# EAGLE board Chamber VIP_2 (EAGLE 7.6.0)
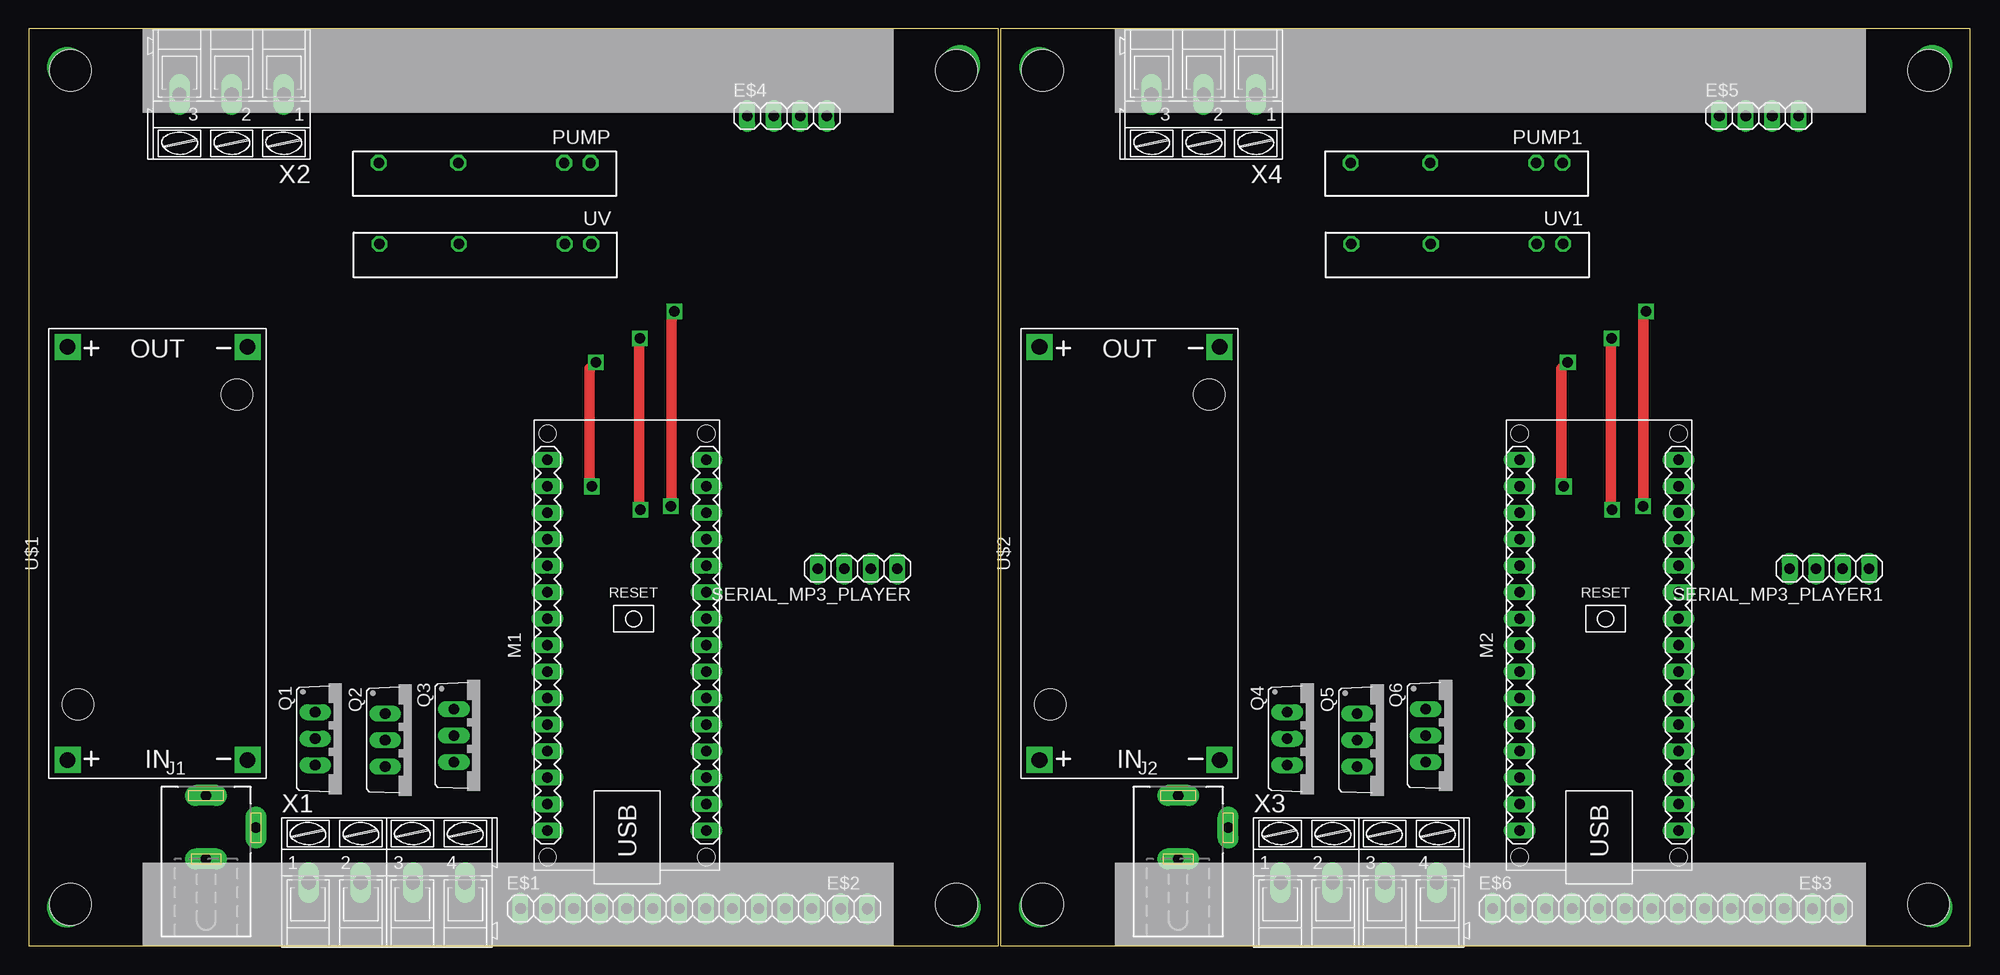
[diagram p0: board, top side]
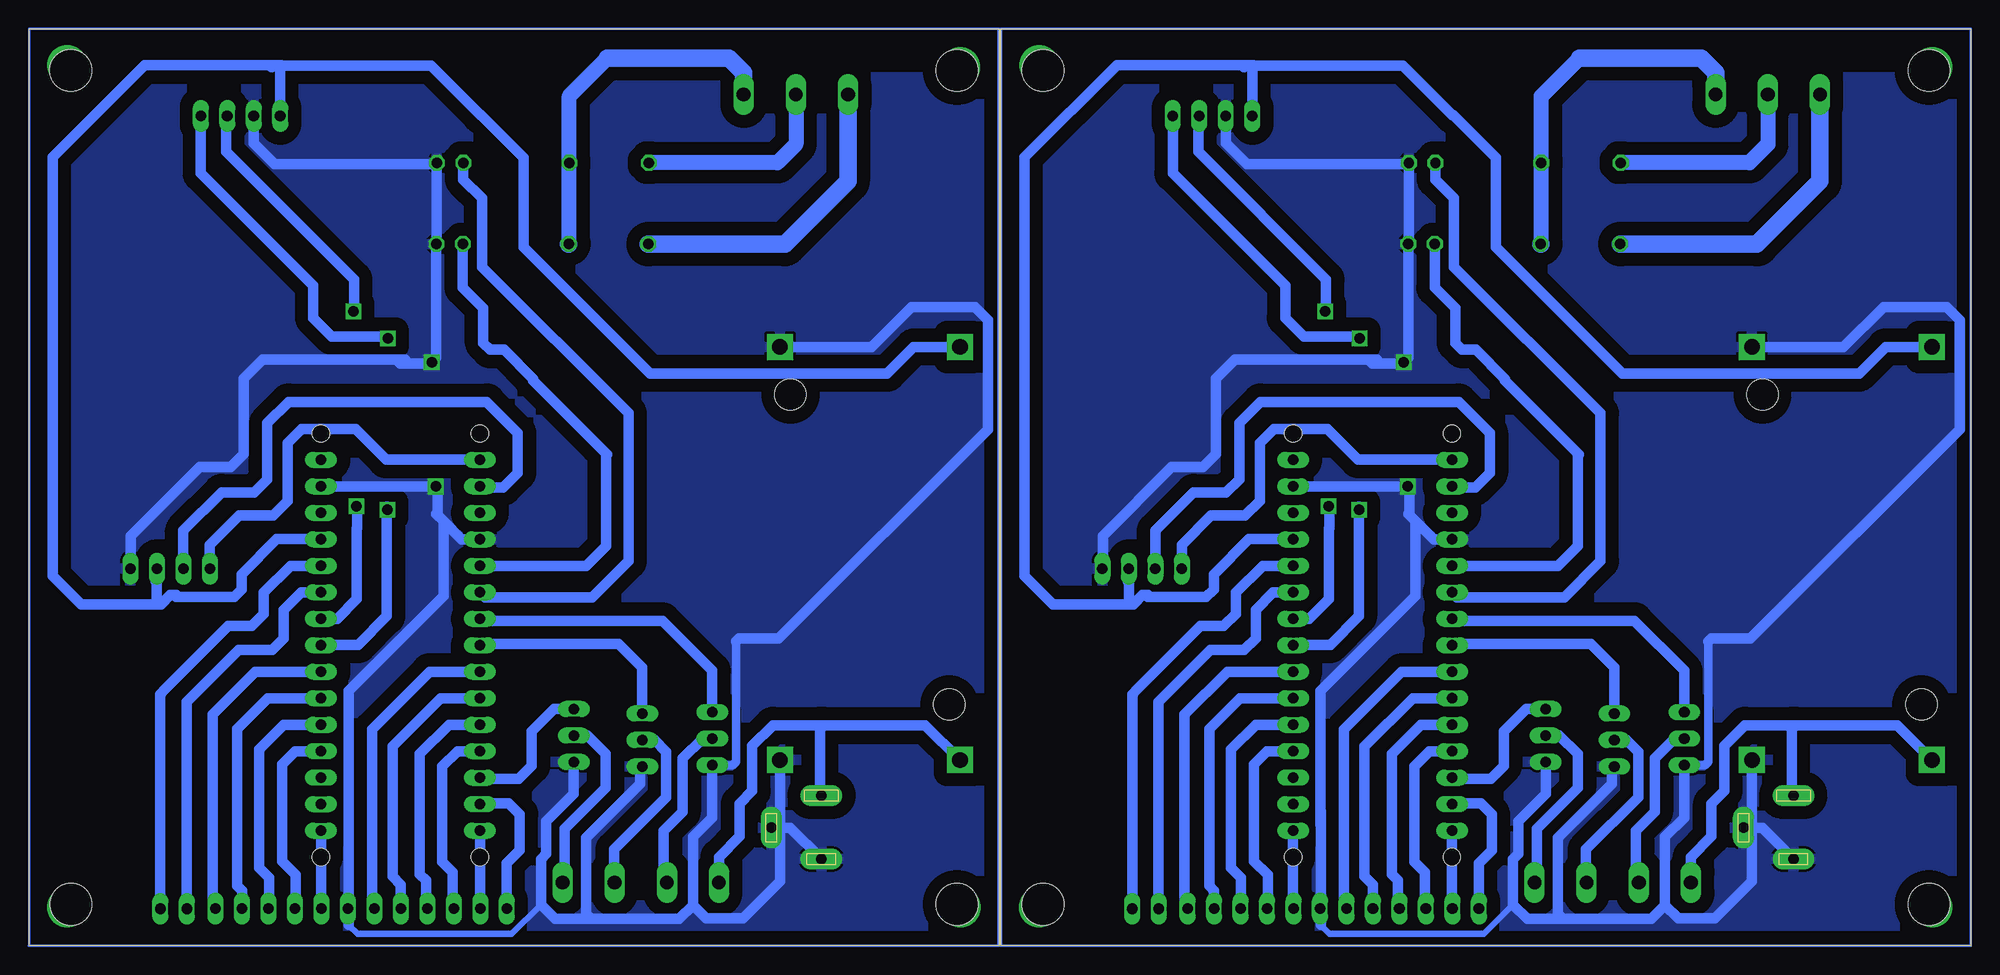
[diagram p1: board, bottom side, seen from below]

Size 186.23 x 88 mm. Coordinates in mm from the lower left corner, seen from the top.
Outline: 0,0 93,0 93,88 0,88 0,0
Outline: 93.23,0 186.23,0 186.22,88 93.23,88 93.23,0
Copper layers (1*16): Top 0.035mm / dielectric 1.5mm / Bottom 0.035mm
Design rules "default": minimum track width 10mil, minimum drill 24mil, track to track 8mil, track to pad 8mil, pad to pad 8mil, via to via 8mil, smd to smd 8mil, copper to edge 40mil, drill to drill 8mil, minimum pad ring 10mil, minimum via ring 8mil, stop-mask expansion 4mil, vias tented up to drill 0mil, thermal gap 10mil
Holes 4 mm at 4,84 89,84 88.99,4 4,4.01 97.23,84 182.22,84 182.22,4 97.23,4.01

## Footprints (pad centres in the part's own frame; a part is rotated, then mirrored left to right if it is on the bottom)
1X12 = drill 1.016 long: 1 -13.97,0; 2 -11.43,0; 3 -8.89,0; 4 -6.35,0; 5 -3.81,0; 6 -1.27,0; 7 1.27,0; 8 3.81,0; 9 6.35,0; 10 8.89,0; 11 11.43,0; 12 13.97,0
1X02 = drill 1.016 long: 1 -1.27,0; 2 1.27,0
1X04 = drill 1.016 long: 1 -3.81,0; 2 -1.27,0; 3 1.27,0; 4 3.81,0
DCJ0202 = drill 1 pad 2 long: 1 0,3.1; 2 4.8,0; 3 0,-3
ARDUINO-NANO-3.0 = drill 1 pad 1.524 long: J1.1 17.78,7.62; J1.2 15.24,7.62; J1.3 12.7,7.62; J1.4 10.16,7.62; J1.5 7.62,7.62; J1.6 5.08,7.62; J1.7 2.54,7.62; J1.8 0,7.62; J1.9 -2.54,7.62; J1.10 -5.08,7.62; J1.11 -7.62,7.62; J1.12 -10.16,7.62; J1.13 -12.7,7.62; J1.14 -15.24,7.62; J1.15 -17.78,7.62; J2.1 17.78,-7.62; J2.2 15.24,-7.62; J2.3 12.7,-7.62; J2.4 10.16,-7.62; J2.5 7.62,-7.62; J2.6 5.08,-7.62; J2.7 2.54,-7.62; J2.8 0,-7.62; J2.9 -2.54,-7.62; J2.10 -5.08,-7.62; J2.11 -7.62,-7.62; J2.12 -10.16,-7.62; J2.13 -12.7,-7.62; J2.14 -15.24,-7.62; J2.15 -17.78,-7.62 | hole 1.651: -20.32,7.62; -20.32,-7.62; 20.32,-7.62; 20.32,7.62
AQG = drill 1 octagon: + -7.62,0; - -10.16,0; O1 2.54,0; O2 10.16,0
TO220BV = drill 1.016 long: D 0,-2.54; G -2.54,-2.54; S 2.54,-2.54
DC-DC-STEP-DOWN-LM2596 = drill 1.5 pad 2.5 square: IN+ -19.812,8.636; IN- -19.812,-8.636; OUT+ 19.812,8.636; OUT- 19.812,-8.636 | hole 3: -14.478,7.62; 15.24,-7.62
AK300/4 = drill 1.321 long: 1 -7.493,0; 2 -2.515,0; 3 2.515,0; 4 7.493,0
AK300/3 = drill 1.321 long: 1 -5.004,0; 2 0,0; 3 5.004,0

## Placement (x,y rotation side)
E$1  [1X12]  61.15,3.58 0 top
E$2  [1X02]  79.15,3.57 0 top
E$3  [1X02]  172.37,3.57 0 top
E$4  [1X04]  72.73,79.63 0 top
E$5  [1X04]  165.95,79.63 0 top
E$6  [1X12]  154.38,3.58 0 top
J1  DCJ0202  [DCJ0202]  17.01,11.35 0 top
J2  DCJ0202  [DCJ0202]  110.24,11.35 0 top
M1  ARDUINO-NANO-3.0#ISP  [ARDUINO-NANO-3.0]  57.38,28.85 90 top
M2  ARDUINO-NANO-3.0#ISP  [ARDUINO-NANO-3.0]  150.61,28.85 90 top
PUMP  AQG12105  [AQG]  43.73,75.14 180 top
PUMP1  AQG12105  [AQG]  136.96,75.14 180 top
Q1  IRF540  [TO220BV]  30.02,19.88 270 top
Q2  IRF540  [TO220BV]  36.73,19.76 270 top
Q3  IRF540  [TO220BV]  43.3,20.2 270 top
Q4  IRF540  [TO220BV]  123.24,19.88 270 top
Q5  IRF540  [TO220BV]  129.96,19.76 270 top
Q6  IRF540  [TO220BV]  136.53,20.2 270 top
SERIAL_MP3_PLAYER  [1X04]  79.47,36.2 180 top
SERIAL_MP3_PLAYER1  [1X04]  172.7,36.2 180 top
U$1  DC-DC-STEP-DOWN-LM2596  [DC-DC-STEP-DOWN-LM2596]  12.36,37.65 90 top
U$2  DC-DC-STEP-DOWN-LM2596  [DC-DC-STEP-DOWN-LM2596]  105.58,37.65 90 top
UV  AQG12105  [AQG]  43.79,67.34 180 top
UV1  AQG12105  [AQG]  137.01,67.34 180 top
X1  [AK300/4]  34.34,6.09 0 top
X2  [AK300/3]  19.47,81.7 180 top
X3  [AK300/4]  127.57,6.09 0 top
X4  [AK300/3]  112.69,81.7 180 top

## Library data of the parts
E$1-E$6 SERIAL_MP3_PLAYER SERIAL_MP3_PLAYER1 = pinhead
J1 J2 = con-jack; OC_FARNELL: unknown; OC_NEWARK: unknown
M1 M2 U$1 U$2 = diy-modules
PUMP PUMP1 UV UV1 = relay; MF: AROMAT/ MATSUSHITA; MPN: AQG12105; OC_FARNELL: unknown; OC_NEWARK: 20J4759
Q1-Q6 = transistor-power
X1-X4 = con-ptr500; OC_FARNELL: unknown; OC_NEWARK: unknown

## Nets
3V1: M2.J2.14
3V3: M1.J2.14
+5V: E$4.1 M1.J2.4 SERIAL_MP3_PLAYER.2 U$1.OUT+
+5V1: E$5.1 M2.J2.4 SERIAL_MP3_PLAYER1.2 U$2.OUT+
GND: E$1.7 E$4.2 J1.2 J1.3 M1.J1.4 M1.J2.2 PUMP.- Q1.S Q2.S Q3.S SERIAL_MP3_PLAYER.1 U$1.IN- U$1.OUT- UV.-
GND1: E$5.2 E$6.7 J2.2 J2.3 M2.J1.4 M2.J2.2 PUMP1.- Q4.S Q5.S Q6.S SERIAL_MP3_PLAYER1.1 U$2.IN- U$2.OUT- UV1.-
N$1: Q3.D X1.4
N$2: J1.1 U$1.IN+ X1.1
N$3: Q1.D X1.2
N$4: Q2.D X1.3
N$5: J2.1 U$2.IN+ X3.1
N$6: PUMP.O2 X2.2
N$7: PUMP.O1 UV.O1 X2.1
N$8: Q4.D X3.2
N$9: PUMP1.O2 X4.2
N$10: PUMP1.O1 UV1.O1 X4.1
N$11: M2.J1.5 UV1.+
N$12: Q6.D X3.4
N$13: M1.J1.5 UV.+
N$14: Q5.D X3.3
N$16: M2.J1.6 PUMP1.+
N$20: M1.J1.6 PUMP.+
N$25: E$1.2 M1.J1.15
N$29: UV.O2 X2.3
N$30: E$6.2 M2.J1.15
N$31: UV1.O2 X4.3
S$1: E$4.3 M1.J2.7
S$4: M1.J1.2 SERIAL_MP3_PLAYER.3
S$5: M1.J1.1 SERIAL_MP3_PLAYER.4
S$6: E$1.6 M1.J1.9
S$7: M1.J1.7 Q1.G
S$8: E$1.4 M1.J1.11
S$9: E$1.3 M1.J1.12
S$10: M1.J1.13 Q3.G
S$11: E$1.1 M1.J1.14
S$12: E$2.2 M1.J2.5
S$13: E$2.1 M1.J2.6
S$14: E$1.12 M1.J2.9
S$15: E$1.11 M1.J2.10
S$16: E$1.10 M1.J2.11
S$17: E$1.9 M1.J2.12
S$18: E$1.8 M1.J2.15
S$19: M1.J1.8 Q2.G
S$20: E$4.4 M1.J2.8
S$21: E$1.5 M1.J1.10
S$23: E$6.5 M2.J1.10
S$24: E$6.4 M2.J1.11
S$25: E$6.6 M2.J1.9
S$26: M2.J1.2 SERIAL_MP3_PLAYER1.3
S$27: M2.J1.7 Q4.G
S$29: M2.J1.1 SERIAL_MP3_PLAYER1.4
S$30: E$6.3 M2.J1.12
S$31: M2.J1.13 Q6.G
S$32: E$6.1 M2.J1.14
S$33: E$3.2 M2.J2.5
S$34: E$3.1 M2.J2.6
S$35: E$6.12 M2.J2.9
S$36: E$6.11 M2.J2.10
S$37: E$6.10 M2.J2.11
S$38: E$6.9 M2.J2.12
S$39: E$6.8 M2.J2.15
S$40: E$5.3 M2.J2.7
S$41: E$5.4 M2.J2.8
S$42: M2.J1.8 Q5.G
VIN: M1.J2.1
VIN1: M2.J2.1

## Tracks (layer width: path | path; a pad name or v marks a point on that pad's centre or on a via)
+5V
  Bottom 1.016: 68.76,84.45 54.46,84.45 49.7,79.69 49.64,79.69 45.56,75.61 45.56,67.05 33.44,54.93 10.71,54.93 8.17,57.47 U$1.OUT+ | 68.76,84.45 69.15,84.45 | 69.15,84.45 69.89,84.45 69.73,84.3 | M1.J2.4 65.03,39.03 69.24,39.03 72.61,35.66 72.61,34.21 73.33,33.48 78.91,33.48 78.91,33.66 79.45,33.66 80.33,32.78 80.96,32.78 | SERIAL_MP3_PLAYER.2 80.75,34.96 | 80.75,34.96 80.85,34.96 | 80.96,32.78 88.02,32.78 90.74,35.5 90.74,75.66 81.9,84.5 68.81,84.5 68.76,84.45 | 80.75,34.96 80.75,32.99 80.96,32.78 | E$4.1 68.92,84.22 69.15,84.45
+5V1
  Bottom 1.016: 161.99,84.45 147.69,84.45 142.93,79.69 142.86,79.69 138.79,75.61 138.79,67.05 126.67,54.93 103.93,54.93 101.4,57.47 U$2.OUT+ | 161.99,84.45 162.38,84.45 | 162.38,84.45 163.11,84.45 162.96,84.3 | M2.J2.4 158.25,39.03 162.47,39.03 165.84,35.66 165.84,34.21 166.56,33.48 172.13,33.48 172.13,33.66 172.68,33.66 173.56,32.78 174.19,32.78 | SERIAL_MP3_PLAYER1.2 173.97,34.96 | 173.97,34.96 174.07,34.96 | 174.19,32.78 181.24,32.78 183.97,35.5 183.97,75.66 175.13,84.5 162.04,84.5 161.99,84.45 | 173.97,34.96 173.97,32.99 174.19,32.78 | E$5.1 162.14,84.22 162.38,84.45
GND  (via drill 1)
  Top 1.016: 53.84,55.45 v54.39,55.99 53.79,55.39 53.79,44.09 v54.01,44.09
  Bottom 0.61: 43.91,3.96 46.72,1.15 61.51,1.15 62.34,1.98 62.34,2.04
  Bottom 0.813: 25.17,29.21 25.17,17.67 25.52,17.32 27.46,17.32 Q1.S
  Bottom 1.016: J1.3 20.01,11.35 J1.2 21,12.17 U$1.IN- 21,6.2 24.54,2.65 28.05,2.65 29.32,3.92 | Q2.S 34.41,17 34.41,15.56 39.59,10.38 39.59,3.07 39.12,2.6 | Q1.S 27.48,12.31 29.32,10.47 29.32,3.92 | 29.32,3.92 30.64,2.6 39.12,2.6 | 39.12,2.6 42.55,2.6 43.91,3.96 43.91,8.33 43.41,8.83 43.41,11.97 40.76,14.61 Q3.S | 62.34,12.9 62.34,11.58 | 62.34,11.58 62.34,3.91 | 62.34,3.91 62.34,2.04 | 62.34,11.58 62.37,11.61 62.37,24.46 53.25,33.58 53.25,40.76 | 57.77,56.26 70.59,56.26 72.4,54.45 72.4,47.19 73.66,45.93 76.65,45.93 83.24,39.34 83.24,35.82 | 57.77,56.26 56.94,56.26 | U$1.OUT- 12.21,57.47 8.37,61.31 2.3,61.31 1.05,60.06 1.05,49.57 21.13,29.49 24.89,29.49 25.17,29.21 | PUMP.- | PUMP.- 53.89,67.4 UV.- 53.95,56.43 v54.39,55.99 54.5,55.88 57.4,55.88 57.77,56.26 | M1.J1.4 51.5,39.01 53.25,40.76 | 53.25,40.76 53.95,41.46 | E$4.2 71.46,77.02 69.43,74.99 54.04,74.99 PUMP.- | 53.25,40.76 | E$1.7 62.42,3.83 62.34,3.91 | M1.J2.2 54.06,44.09 53.84,43.87 | 53.84,43.87 53.84,41.41 53.84,41.35 53.25,40.76 | 53.84,43.87 53.84,43.92 v54.01,44.09
  pour Bottom (isolate 1.27): 0.32,83.32 93.31,83.32 93.31,-0.54 0.32,-0.54
GND1  (via drill 1)
  Top 1.016: 147.07,55.45 v147.61,55.99 147.01,55.39 147.01,44.09 v147.23,44.09
  Bottom 0.61: 137.13,3.96 139.95,1.15 154.74,1.15 155.57,1.98 155.57,2.04
  Bottom 0.813: 118.4,29.21 118.4,17.67 118.74,17.32 120.69,17.32 Q4.S
  Bottom 1.016: J2.3 113.24,11.35 J2.2 114.22,12.17 U$2.IN- 114.22,6.2 117.77,2.65 121.28,2.65 122.55,3.92 | Q5.S 127.64,17 127.64,15.56 132.82,10.38 132.82,3.07 132.34,2.6 | Q4.S 120.7,12.31 122.55,10.47 122.55,3.92 | 122.55,3.92 123.87,2.6 132.34,2.6 | 132.34,2.6 135.77,2.6 137.13,3.96 137.13,8.33 136.63,8.83 136.63,11.97 133.99,14.61 Q6.S | 155.57,12.9 155.57,11.58 | 155.57,11.58 155.57,3.91 | 155.57,3.91 155.57,2.04 | 155.57,11.58 155.59,11.61 155.59,24.46 146.48,33.58 146.48,40.76 | 151,56.26 163.81,56.26 165.62,54.45 165.62,47.19 166.88,45.93 169.87,45.93 176.47,39.34 176.47,35.82 | 151,56.26 150.16,56.26 | U$2.OUT- 105.44,57.47 101.59,61.31 95.53,61.31 94.28,60.06 94.28,49.57 114.36,29.49 118.12,29.49 118.4,29.21 | PUMP1.- | PUMP1.- 147.12,67.4 UV1.- 147.17,56.43 v147.61,55.99 147.72,55.88 150.62,55.88 151,56.26 | M2.J1.4 144.72,39.01 146.47,40.76 | 146.47,40.76 147.18,41.46 | E$5.2 164.68,77.02 162.66,74.99 147.26,74.99 PUMP1.- | 146.48,40.76 146.47,40.76 | E$6.7 155.65,3.83 155.57,3.91 | M2.J2.2 147.29,44.09 147.07,43.87 | 147.07,43.87 147.07,41.41 147.07,41.35 146.48,40.76 | 147.07,43.87 147.07,43.92 v147.23,44.09
  pour Bottom (isolate 1.27): 93.55,83.32 186.54,83.32 186.54,-0.54 93.55,-0.54
N$1
  Bottom 1.016: X1.4 41.62,6.31 41.62,11.24 37.71,15.15 37.71,18.42 39.49,20.2 Q3.D
N$2
  Bottom 1.016: 17.16,21.18 21.67,21.18 23.66,19.2 23.66,14.87 24.88,13.64 24.88,10.5 26.85,8.53 X1.1 | 17.16,21.18 16.83,21.18 | 16.83,21.18 7.06,21.18 U$1.IN+ | 16.76,21.11 16.83,21.18 | J1.1 17.16,14.59 17.16,21.18
N$3
  Bottom 1.016: X1.2 32.15,6.41 32.15,11.05 30.33,12.87 30.33,17.98 28.43,19.88 Q1.D
N$4
  Bottom 1.016: Q2.D 33.03,19.76 31.91,18.63 31.91,14.27 36.91,9.27 36.91,6.14 X1.3
N$5
  Bottom 1.016: 110.38,21.18 114.9,21.18 116.88,19.2 116.88,14.87 118.11,13.64 118.11,10.5 120.08,8.53 X3.1 | 110.38,21.18 110.06,21.18 | 110.06,21.18 100.29,21.18 U$2.IN+ | 109.99,21.11 110.06,21.18 | J2.1 110.38,14.59 110.38,21.18
N$6
  Bottom 1.422: X2.2 19.47,76.9 21.24,75.13 PUMP.O2
  Bottom 1.676: X2.2 19.47,81.44 19.42,81.39
N$7
  Bottom 1.422: UV.O1 41.19,67.34 PUMP.O1 41.19,81.52 37.56,85.16
  Bottom 1.676: X2.1 24.47,83.77 25.86,85.16 37.56,85.16 | UV.O1
N$8
  Bottom 1.016: X3.2 125.37,6.41 125.37,11.05 123.55,12.87 123.55,17.98 121.66,19.88 Q4.D
N$9
  Bottom 1.422: X4.2 112.69,76.9 114.46,75.13 PUMP1.O2
  Bottom 1.676: X4.2 112.69,81.44 112.64,81.39
N$10
  Bottom 1.422: UV1.O1 134.42,67.34 PUMP1.O1 134.42,81.52 130.79,85.16
  Bottom 1.676: X4.1 117.7,83.77 119.08,85.16 130.79,85.16 | UV1.O1
N$11
  Bottom 1.016: UV1.+ 144.63,63.15 142.67,61.19 142.67,57.84 142.03,57.2 140.69,57.2 137.89,54.4 137.89,54.23 131.62,47.96 130.89,47.23 | 130.89,47.23 130.8,47.14 | M2.J1.5 132.82,36.47 130.89,38.4 130.89,47.23
N$12
  Bottom 1.016: X3.4 134.84,6.31 134.84,11.24 130.93,15.15 130.93,18.42 132.71,20.2 Q6.D
N$13
  Bottom 1.016: UV.+ 51.41,63.15 49.45,61.19 49.45,57.84 48.8,57.2 47.46,57.2 44.66,54.4 44.66,54.23 38.4,47.96 37.66,47.23 | 37.66,47.23 37.57,47.14 | M1.J1.5 39.59,36.47 37.66,38.4 37.66,47.23
N$14
  Bottom 1.016: Q5.D 126.26,19.76 125.13,18.63 125.13,14.27 130.14,9.27 130.14,6.14 X3.3
N$16
  Bottom 1.016: PUMP1.+ 144.58,73.54 142.78,71.74 142.78,65.14 128.75,51.11 128.75,36.93 132.23,33.45 142.51,33.45 M2.J1.6 142.97,33.95
N$17  (via drill 2.8 pad 3.81)
  other vias: 182.58,3.71
N$18  (via drill 2.8 pad 3.81)
  other vias: 89.36,3.71
N$20
  Bottom 1.016: PUMP.+ 51.35,73.54 49.55,71.74 49.55,65.14 35.52,51.11 35.52,36.93 39,33.45 49.28,33.45 M1.J1.6 49.74,33.95
N$21  (via drill 2.8 pad 3.81)
  other vias: 3.67,3.72
N$23  (via drill 2.8 pad 3.81)
  other vias: 89.35,84.49
N$24  (via drill 2.8 pad 3.81)
  other vias: 3.7,84.31
N$25
  Bottom 1.016: M1.J1.15 49.76,3.62 E$1.2
N$26  (via drill 2.8 pad 3.81)
  other vias: 96.9,3.72
N$27  (via drill 2.8 pad 3.81)
  other vias: 182.57,84.49
N$28  (via drill 2.8 pad 3.81)
  other vias: 96.93,84.31
N$29
  Bottom 1.676: X2.3 14.46,73.36 20.51,67.31 33.6,67.31 UV.O2
N$30
  Bottom 1.016: M2.J1.15 142.99,3.62 E$6.2
N$31
  Bottom 1.676: X4.3 107.69,73.36 113.73,67.31 126.82,67.31 UV1.O2
S$1  (via drill 1)
  Top 1.016: v61.6,42.17 61.6,42.01 61.65,41.95 61.65,60.87 61.83,61.05 61.83,60.97 v61.91,60.89
  Bottom 1.016: M1.J2.7 63.46,31.39 61.58,33.27 61.58,40.04 61.52,40.1 61.52,42.1 v61.6,42.17 | v61.91,60.89 61.83,60.97 61.83,63.94 74.08,76.18 74.08,79.55 E$4.3
S$2
  Bottom 0.254: 0,88 93,88 93,0
S$4
  Bottom 1.016: SERIAL_MP3_PLAYER.3 78.2,39.86 74.55,43.51 71.42,43.51 70.16,44.77 70.16,50.15 68.12,52.19 49.11,52.19 46.15,49.22 46.15,45.38 47.52,44 49.68,44 M1.J1.2
S$5
  Bottom 1.016: SERIAL_MP3_PLAYER.4 75.67,38.47 72.86,41.28 69.61,41.28 68.19,42.71 68.19,48.25 66.84,49.6 61.7,49.6 58.77,46.67 49.8,46.67 M1.J1.1
S$6
  Bottom 1.016: M1.J1.9 54.59,26.31 60.12,20.78 60.12,3.81 E$1.6
S$7
  Bottom 1.016: 49.68,31.31 M1.J1.7 49.57,31.2 32.26,31.2 27.48,26.42 Q1.G
S$8
  Bottom 1.016: M1.J1.11 52.72,21.23 55.53,18.42 55.53,6.87 54.94,6.28 54.94,3.72 E$1.4
S$9
  Bottom 1.016: M1.J1.12 51.91,18.69 53.36,17.24 53.36,8.05 52.38,7.07 52.38,3.7 E$1.3
S$10
  Bottom 1.016: Q3.G 42.62,22.74 44.78,20.58 44.78,17.3 46.03,16.05 49.67,16.05 M1.J1.13
S$11
  Bottom 1.016: E$1.1 47.18,7.94 45.95,9.17 45.95,12.65 47,13.69 49.67,13.69 M1.J1.14
S$12
  Bottom 1.016: M1.J2.5 67.91,36.47 70.48,33.9 70.48,31.86 71.66,30.68 73.89,30.68 79.97,24.59 80.42,24.15 | 80.42,24.15 | E$2.2 80.42,24.15
S$13
  Bottom 1.016: M1.J2.6 66.91,33.93 68.58,32.26 68.58,29.5 69.7,28.39 72.91,28.39 77.89,23.4 77.89,3.58 E$2.1
S$14
  Bottom 1.016: M1.J2.9 71.31,26.31 75.4,22.22 75.4,3.86 E$1.12
S$15
  Bottom 1.016: M1.J2.10 70.12,23.77 73.04,20.84 73.04,5.76 72.58,5.3 E$1.11
S$16
  Bottom 1.016: M1.J2.11 68.57,21.23 70.95,18.85 70.95,7.51 69.98,6.54 69.98,3.64 E$1.10
S$17
  Bottom 1.016: M1.J2.12 67.5,18.69 68.75,17.44 68.75,8.14 67.41,6.81 67.41,3.67 E$1.9
S$18
  Bottom 1.016: M1.J2.15 65,3.62 E$1.8
S$19
  Bottom 1.016: Q2.G 34.19,26.7 36.46,28.97 49.88,28.97 | 50.29,28.97 49.88,28.97 | 49.88,28.97 M1.J1.8
S$20  (via drill 1)
  Top 1.016: v58.6,58.28 58.54,58.22 58.54,41.97 v58.65,41.86
  Bottom 1.016: E$4.4 76.54,74.12 65.75,63.33 65.75,60.25 63.98,58.48 58.8,58.48 v58.6,58.28 | v58.65,41.86 58.65,42.14 58.69,42.18 58.69,31.64 61.43,28.9 64.95,28.9 M1.J2.8
S$21
  Bottom 1.016: M1.J1.10 53.52,23.77 58.15,19.14 58.15,6.67 57.36,5.89 57.36,3.6 E$1.5
S$22
  Bottom 0.254: 0.02,87.91 0.02,0 93.04,0
S$23
  Bottom 1.016: M2.J1.10 146.75,23.77 151.38,19.14 151.38,6.67 150.59,5.89 150.59,3.6 E$6.5
S$24
  Bottom 1.016: M2.J1.11 145.94,21.23 148.75,18.42 148.75,6.87 148.16,6.28 148.16,3.72 E$6.4
S$25
  Bottom 1.016: M2.J1.9 147.81,26.31 153.34,20.78 153.34,3.81 E$6.6
S$26
  Bottom 1.016: SERIAL_MP3_PLAYER1.3 171.43,39.86 167.78,43.51 164.65,43.51 163.38,44.77 163.38,50.15 161.35,52.19 142.34,52.19 139.37,49.22 139.37,45.38 140.75,44 142.9,44 M2.J1.2
S$27
  Bottom 1.016: 142.91,31.31 M2.J1.7 142.8,31.2 125.48,31.2 120.7,26.42 Q4.G
S$28
  Bottom 0.254: 93.23,88 186.23,88 186.23,0
S$29
  Bottom 1.016: SERIAL_MP3_PLAYER1.4 168.89,38.47 166.08,41.28 162.84,41.28 161.41,42.71 161.41,48.25 160.07,49.6 154.93,49.6 152,46.67 143.03,46.67 M2.J1.1
S$30
  Bottom 1.016: M2.J1.12 145.14,18.69 146.59,17.24 146.59,8.05 145.61,7.07 145.61,3.7 E$6.3
S$31
  Bottom 1.016: Q6.G 135.85,22.74 138.01,20.58 138.01,17.3 139.26,16.05 142.89,16.05 M2.J1.13
S$32
  Bottom 1.016: E$6.1 140.41,7.94 139.18,9.17 139.18,12.65 140.23,13.69 142.9,13.69 M2.J1.14
S$33
  Bottom 1.016: M2.J2.5 161.14,36.47 163.71,33.9 163.71,31.86 164.89,30.68 167.11,30.68 173.2,24.59 173.64,24.15 | 173.64,24.15 173.65,24.15 | E$3.2 173.64,24.15
S$34
  Bottom 1.016: M2.J2.6 160.14,33.93 161.81,32.26 161.81,29.5 162.92,28.39 166.13,28.39 171.12,23.4 171.12,3.58 E$3.1
S$35
  Bottom 1.016: M2.J2.9 164.54,26.31 168.63,22.22 168.63,3.86 E$6.12
S$36
  Bottom 1.016: M2.J2.10 163.34,23.77 166.27,20.84 166.27,5.76 165.81,5.3 E$6.11
S$37
  Bottom 1.016: M2.J2.11 161.8,21.23 164.18,18.85 164.18,7.51 163.2,6.54 163.2,3.64 E$6.10
S$38
  Bottom 1.016: M2.J2.12 160.72,18.69 161.97,17.44 161.97,8.14 160.64,6.81 160.64,3.67 E$6.9
S$39
  Bottom 1.016: M2.J2.15 158.23,3.62 E$6.8
S$40  (via drill 1)
  Top 1.016: v154.82,42.17 154.82,42.01 154.88,41.95 154.88,60.87 155.06,61.05 155.06,60.97 v155.14,60.89
  Bottom 1.016: M2.J2.7 156.69,31.39 154.8,33.27 154.8,40.04 154.75,40.1 154.75,42.1 v154.82,42.17 | v155.14,60.89 155.06,60.97 155.06,63.94 167.3,76.18 167.3,79.55 E$5.3
S$41  (via drill 1)
  Top 1.016: v151.83,58.28 151.76,58.22 151.76,41.97 v151.87,41.86
  Bottom 1.016: E$5.4 169.76,74.12 158.98,63.33 158.98,60.25 157.21,58.48 152.03,58.48 v151.83,58.28 | v151.87,41.86 151.87,42.14 151.92,42.18 151.92,31.64 154.66,28.9 158.18,28.9 M2.J2.8
S$42
  Bottom 1.016: Q5.G 127.42,26.7 129.68,28.97 143.11,28.97 | 143.52,28.97 143.11,28.97 | 143.11,28.97 M2.J1.8
S$43
  Bottom 0.254: 93.25,87.91 93.25,0 186.26,0